# EAGLE board SPEC_ANAL (EAGLE 6.5.0)
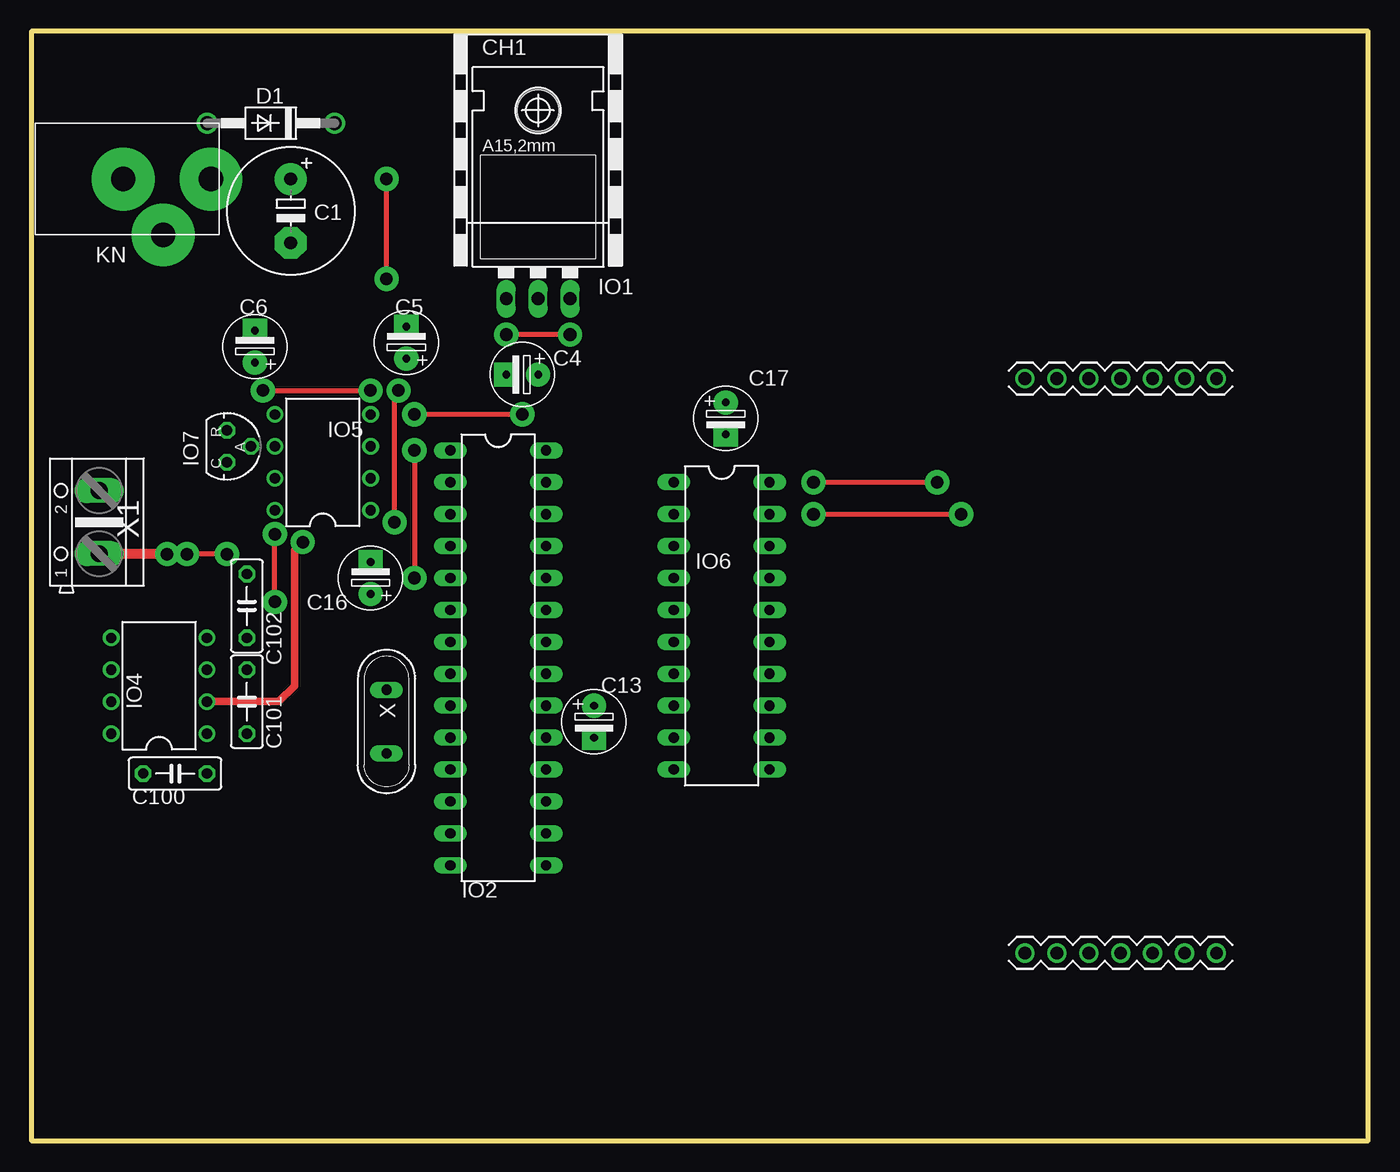
[diagram p0: board, top side]
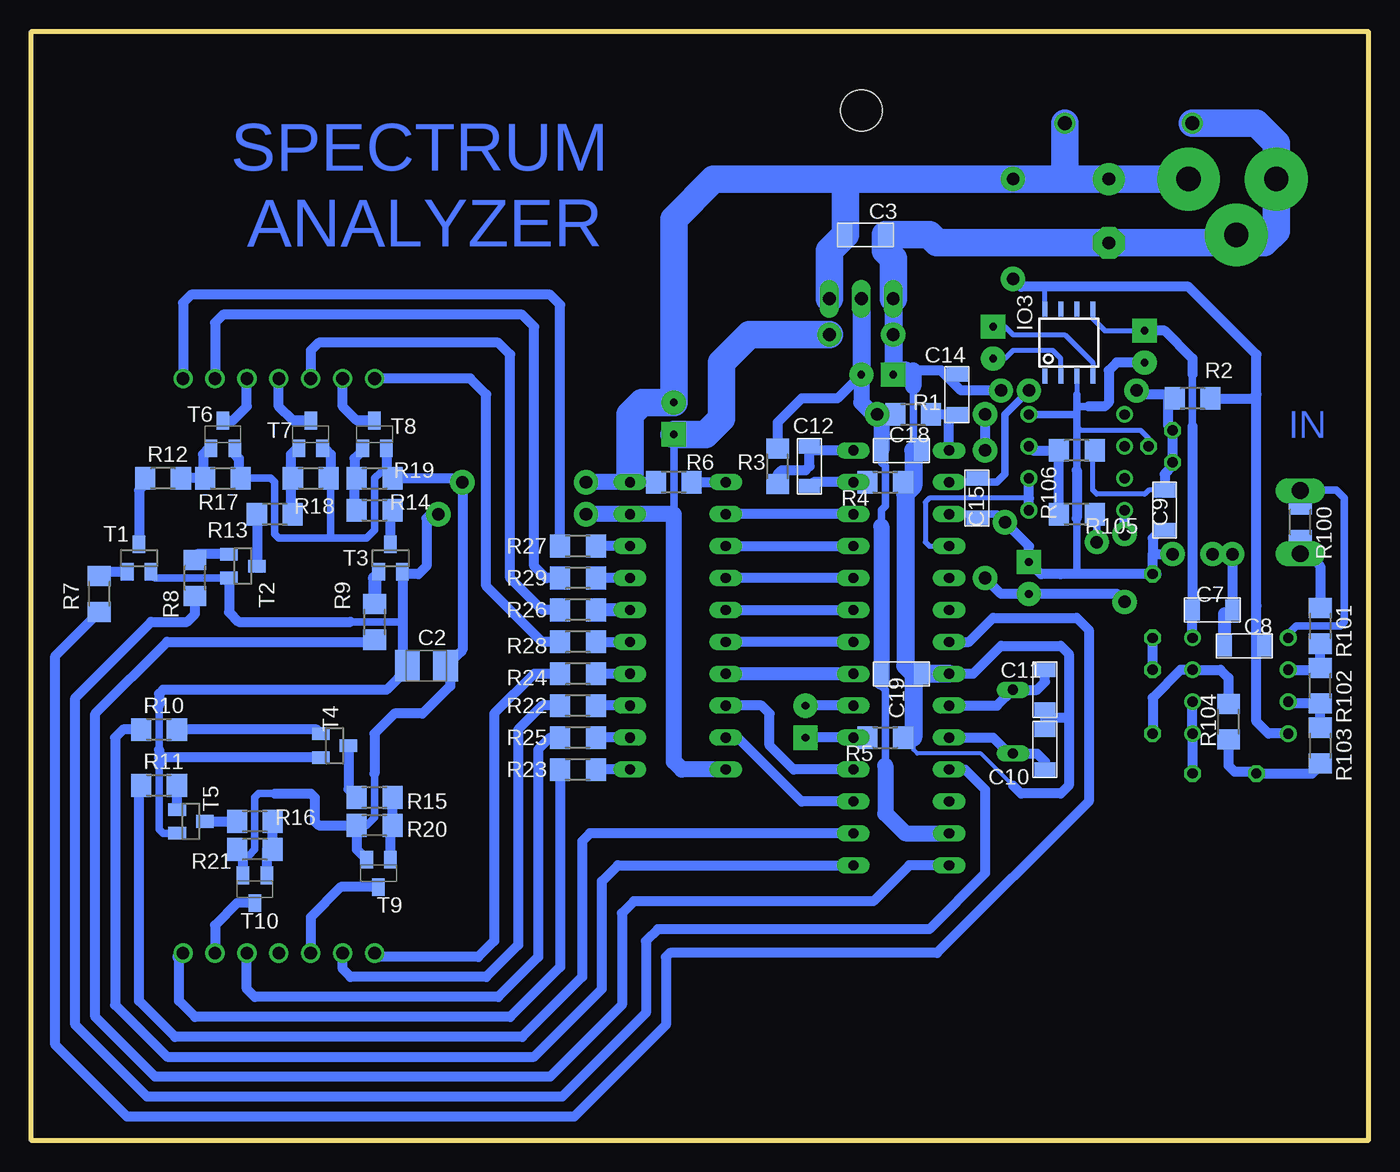
[diagram p1: board, bottom side, seen from below]

Size 106.36 x 88.27 mm. Coordinates in mm from the lower left corner, seen from the top.
Outline: 0,0 106.36,0 106.36,88.27 0,88.27 0,0
Copper layers (1*16): Top 0.035mm / dielectric 1.5mm / Bottom 0.035mm
Design rules "default *": minimum track width 10mil, minimum drill 24mil, track to track 8mil, track to pad 8mil, pad to pad 8mil, via to via 8mil, smd to smd 8mil, copper to edge 40mil, drill to drill 8mil, minimum pad ring 10mil, minimum via ring 8mil, stop-mask expansion 4mil, vias tented up to drill 0mil, thermal gap 10mil

## Footprints (pad centres in the part's own frame; a part is rotated, then mirrored left to right if it is on the bottom)
E5-10,5 = drill 1.016 pad 2.54: + -2.54,0 | drill 1.016 pad 2.54 octagon: - 2.54,0
B/3528-21R = smd 1.95 x 2.5: + 1.525,0; - -1.525,0
CK+ = smd 1.14 x 1.7: 1 -1.587,0; 2 1.587,0
ES-2,5L = drill 0.61 pad 1.93: 1 0,0 | drill 0.61 pad 1.93 square: 2 2.54,0
C050-025X075 = drill 0.813 octagon: 1 -2.54,0; 2 2.54,0
DO41-10 = drill 1.118: A 5.08,0; C -5.08,0
MATRIX_60MM_14PIN = drill 1.016: 1 -7.62,-22.86; 2 -5.08,-22.86; 3 -2.54,-22.86; 4 0,-22.86; 5 2.54,-22.86; 6 5.08,-22.86; 7 7.62,-22.86; 8 7.62,22.86; 9 5.08,22.86; 10 2.54,22.86; 11 0,22.86; 12 -2.54,22.86; 13 -5.08,22.86; 14 -7.62,22.86
TO220L1 = drill 1.016 long: 1 -2.54,-3.81; 2 0,-3.81; 3 2.54,-3.81 | hole 3.302: 0,11.176
DIL28-3 = drill 0.813 long: 1 -16.51,-3.81; 2 -13.97,-3.81; 3 -11.43,-3.81; 4 -8.89,-3.81; 5 -6.35,-3.81; 6 -3.81,-3.81; 7 -1.27,-3.81; 8 1.27,-3.81; 9 3.81,-3.81; 10 6.35,-3.81; 11 8.89,-3.81; 12 11.43,-3.81; 13 13.97,-3.81; 14 16.51,-3.81; 15 16.51,3.81; 16 13.97,3.81; 17 11.43,3.81; 18 8.89,3.81; 19 6.35,3.81; 20 3.81,3.81; 21 1.27,3.81; 22 -1.27,3.81; 23 -3.81,3.81; 24 -6.35,3.81; 25 -8.89,3.81; 26 -11.43,3.81; 27 -13.97,3.81; 28 -16.51,3.81
D_R-PDSO-G08 = smd 0.4 x 1.2: 1 -1.905,-2.65; 2 -0.635,-2.65; 3 0.635,-2.65; 4 1.905,-2.65; 5 1.905,2.65; 6 0.635,2.65; 7 -0.635,2.65; 8 -1.905,2.65
DIL08 = drill 0.813 pad 1.27: 1 -3.81,-3.81; 2 -1.27,-3.81; 3 1.27,-3.81; 4 3.81,-3.81; 5 3.81,3.81; 6 1.27,3.81; 7 -1.27,3.81; 8 -3.81,3.81
DIL20 = drill 0.813 long: 1 -11.43,-3.81; 2 -8.89,-3.81; 3 -6.35,-3.81; 4 -3.81,-3.81; 5 -1.27,-3.81; 6 1.27,-3.81; 7 3.81,-3.81; 8 6.35,-3.81; 9 8.89,-3.81; 10 11.43,-3.81; 11 11.43,3.81; 12 8.89,3.81; 13 6.35,3.81; 14 3.81,3.81; 15 1.27,3.81; 16 -1.27,3.81; 17 -3.81,3.81; 18 -6.35,3.81; 19 -8.89,3.81; 20 -11.43,3.81
TO92-CLP = drill 0.813 octagon: A 0,1.905; C 1.27,0; R -1.27,0
K375A = drill 1.93 pad 5: 1 4.445,6.985; 2 4.445,13.97; 3 8.89,10.16
R1206 = smd 1.6 x 1.803: 1 -1.422,0; 2 1.422,0
SOT23 = smd 1 x 1.4: 1 -0.95,-1.1; 2 0.95,-1.1; 3 0,1.1
SOT23-BEC = smd 1 x 1.4: B -0.95,-1.1; C 0,1.1; E 0.95,-1.1
QS = drill 0.813 long: 1 -2.54,0; 2 2.54,0
AK500/2 = drill 1.321 long: 1 -2.515,0; 2 2.515,0

## Placement (x,y rotation side)
C1  E470M/16V  [E5-10,5]  20.64,73.98 270 top
C2  E10M/16V  [B/3528-21R]  74.93,37.78 0 bottom
C3  CK1206 100N  [CK+]  40.01,72.07 0 bottom
C4  E10M/16V low ERS  [ES-2,5L]  40.32,60.96 180 top
C5  E10M/16V  [ES-2,5L]  29.84,62.23 90 top
C6  E10M/16V  [ES-2,5L]  17.78,61.91 90 top
C7  CK1206 100N  [CK+]  12.38,42.23 0 bottom
C8  CK1206 100N  [CK+]  9.84,39.37 0 bottom
C9  CK1206 1N  [CK+]  16.19,50.16 270 bottom
C10  CK1206 22P  [CK+]  25.72,31.11 270 bottom
C11  CK1206 22P  [CK+]  25.72,35.88 90 bottom
C12  CK1206 100N  [CK+]  44.45,53.66 270 bottom
C13  E10M/16V low ERS  [ES-2,5L]  44.77,34.61 270 top
C14  CK1206 1N  [CK+]  32.7,59.37 90 bottom
C15  CK1206 100N  [CK+]  31.11,51.12 270 bottom
C16  E47M/16V  [ES-2,5L]  26.99,43.5 90 top
C17  E47M/16V  [ES-2,5L]  55.24,58.74 270 top
C18  CK1206 100N  [CK+]  37.15,54.93 0 bottom
C19  CK1206 100N  [CK+]  37.15,37.15 0 bottom
C100  1N  [C050-025X075]  11.43,29.21 0 top
C101  1N  [C050-025X075]  17.14,34.92 90 top
C102  1N  [C050-025X075]  17.14,42.55 90 top
CH1  D0A-L  [D02A-L]  40.32,76.52 270 top
D1  1N4007  [DO41-10]  19.05,80.96 180 top
DISP  [MATRIX_60MM_14PIN]  86.68,37.78 0 top
IO1  LD1117V33  [TO220L1]  40.32,70.8 0 top
IO2  PIC32MX130F064B-I/SP  [DIL28-3]  37.15,38.42 270 top
IO3  TL7660D  [D_R-PDSO-G08]  23.81,63.5 0 bottom
IO4  TL072P  [DIL08]  10.16,36.2 90 top
IO5  MCP6002P  [DIL08]  23.18,53.98 90 top
IO6  74HCT245  [DIL20]  54.93,40.96 270 top
IO7  TL431  [TO92-CLP]  15.56,55.24 270 top
KN  K375A  [K375A]  0.32,80.96 270 top
R1  R1206 10K  [R1206]  36.2,57.78 180 bottom
R2  R1206 330R  [R1206]  13.97,59.05 0 bottom
R3  R1206 10R  [R1206]  46.99,53.66 270 bottom
R4  R1206 0R  [R1206]  38.42,52.39 180 bottom
R5  R1206 0R  [R1206]  38.42,32.07 180 bottom
R6  R1206 0R  [R1206]  55.24,52.39 0 bottom
R7  R1206 1K  [R1206]  100.97,43.5 270 bottom
R8  R1206 1K  [R1206]  93.34,44.77 270 bottom
R9  R1206 1K  [R1206]  79.06,41.27 90 bottom
R10  R1206 1K  [R1206]  96.2,32.7 0 bottom
R11  R1206 1K  [R1206]  96.2,28.26 0 bottom
R12  R1206 1K  [R1206]  95.89,52.7 0 bottom
R13  R1206 1K  [R1206]  87,49.85 0 bottom
R14  R1206 1K  [R1206]  79.06,50.16 180 bottom
R15  R1206 1K  [R1206]  79.06,27.3 0 bottom
R16  R1206 1K  [R1206]  88.58,25.4 0 bottom
R17  R1206 100K  [R1206]  91.12,52.7 180 bottom
R18  R1206 100K  [R1206]  84.14,52.7 180 bottom
R19  R1206 100K  [R1206]  79.06,52.7 180 bottom
R20  R1206 100K  [R1206]  79.06,25.08 0 bottom
R21  R1206 100K  [R1206]  88.58,23.18 0 bottom
R22  R1206 100R  [R1206]  62.87,34.61 0 bottom
R23  R1206 100R  [R1206]  62.87,29.53 0 bottom
R24  R1206 100R  [R1206]  62.87,37.15 0 bottom
R25  R1206 100R  [R1206]  62.87,32.07 0 bottom
R26  R1206 100R  [R1206]  62.87,42.23 0 bottom
R27  R1206 100R  [R1206]  62.87,47.31 0 bottom
R28  R1206 100R  [R1206]  62.87,39.69 0 bottom
R29  R1206 100R  [R1206]  62.87,44.77 0 bottom
R100  R1206 100K  [R1206]  5.4,49.21 270 bottom
R101  R1206 10K  [R1206]  3.81,40.96 90 bottom
R102  R1206 10K  [R1206]  3.81,36.2 270 bottom
R103  R1206 13K3  [R1206]  3.81,31.43 90 bottom
R104  R1206 13K3  [R1206]  11.11,33.34 270 bottom
R105  R1206 10K  [R1206]  23.18,49.85 0 bottom
R106  R1206 10K  [R1206]  23.18,54.93 0 bottom
T1  BC848  [SOT23]  97.79,46.35 0 bottom
T2  BC848  [SOT23]  89.53,45.72 270 bottom
T3  BC848  [SOT23]  77.79,46.35 0 bottom
T4  BC848  [SOT23]  82.23,31.43 270 bottom
T5  BC848  [SOT23]  93.66,25.4 270 bottom
T6  [SOT23-BEC]  91.12,56.2 0 bottom
T7  [SOT23-BEC]  84.14,56.2 0 bottom
T8  [SOT23-BEC]  79.06,56.2 0 bottom
T9  [SOT23-BEC]  78.74,21.27 180 bottom
T10  [SOT23-BEC]  88.58,20 180 bottom
X  QM 8 MHZ  [QS]  28.26,33.34 270 top
X1  [AK500/2]  5.4,49.21 90 top

## Library data of the parts
C1 C2 C100-C102 R1-R29 R100-R106 = rcl
C3-C19 KN X = !MOJE
CH1 = heatsink
D1 = diode
DISP = matrix
IO1 IO7 = v-reg
IO2 = ic-package
IO3 = texas; MPN: TL7660CD; OC_FARNELL: 1755282; OC_NEWARK: 14M2439
IO4 IO5 = linear
IO6 = 74xx-eu
T1-T10 = transistor
X1 = con-ptr500; OC_FARNELL: unknown; OC_NEWARK: unknown

## Nets
+5V: C1.+ C2.+ C3.1 C8.2 C17.1 D1.C IO1.3 IO3.8 IO4.8 IO6.20 KN.2 R2.2 R6.1 R17.1 R18.1 R19.1 R20.1 R21.1 T6.E T7.E T8.E T9.E T10.E
GND: C1.- C2.- C3.2 C4.2 C6.1 C7.2 C8.1 C9.2 C10.1 C11.1 C14.2 C15.2 C16.2 C17.2 C18.2 C19.2 C102.2 D1.A IO1.1 IO2.3 IO2.8 IO3.3 IO5.4 IO6.10 IO6.19 IO7.A KN.1 KN.3 R4.1 R5.1 R100.2 R101.2 T1.2 T2.2 T3.2 T4.2 T5.2 X1.1
N$1: C14.1 IO2.1 R1.1
N$2: IO2.7 R7.2
N$3: IO2.26 IO6.2
N$4: IO2.25 IO6.3
N$5: R10.2 T4.1
N$6: IO2.24 IO6.4
N$7: C11.2 IO2.9 X.1
N$8: C10.2 IO2.10 X.2
N$9: IO2.23 IO6.5
N$10: IO2.22 IO6.6
N$11: C12.2 IO2.27 R4.2
N$12: C13.2 IO2.19 R5.2
N$13: IO2.21 IO6.7
N$14: IO2.18 IO6.8
N$15: IO2.17 IO6.9
N$16: R15.1 T4.3
N$17: IO2.15 R10.1
N$18: R9.2 T3.1
N$19: R15.2 R20.2 T9.B
N$20: DISP.10 T6.C
N$21: DISP.11 T7.C
N$22: DISP.13 T8.C
N$23: IO6.11 R23.2
N$24: IO6.15 R28.2
N$25: IO6.16 R26.2
N$26: IO6.17 R29.2
N$27: IO6.18 R27.2
N$28: IO6.13 R22.2
N$29: IO6.14 R24.2
N$30: IO6.12 R25.2
N$31: C13.1 IO2.20
N$32: C12.1 IO2.28 R3.2
N$33: DISP.14 R28.1
N$34: DISP.8 R27.1
N$35: DISP.12 R26.1
N$36: DISP.5 R25.1
N$37: DISP.1 R24.1
N$38: DISP.7 R23.1
N$39: DISP.2 R22.1
N$40: DISP.9 R29.1
N$41: IO2.11 R8.2
N$42: IO2.16 R11.1
N$43: R11.2 T5.1
N$44: R16.1 T5.3
N$45: R16.2 R21.2 T10.B
N$46: DISP.6 T10.C
N$47: DISP.3 T9.C
N$48: R14.1 T3.3
N$49: R14.2 R19.2 T8.B
N$50: R7.1 T1.1
N$51: IO2.14 R9.1
N$52: R8.1 T2.1
N$53: R13.1 T2.3
N$54: R13.2 R18.2 T7.B
N$55: IO2.4 IO5.1 IO5.2
N$56: R12.1 T1.3
N$57: R12.2 R17.2 T6.B
N$58: IO5.3 R105.1 R106.1
N$59: IO4.6 R101.1 R102.1
N$60: IO4.5 R100.1 X1.2
N$61: C9.1 C15.1 IO2.2 IO7.C IO7.R R2.1 R106.2
N$62: C6.2 C7.1 IO3.5 IO4.4
N$63: C5.1 IO3.2
N$64: C5.2 IO3.4
N$65: IO6.1 R6.2
N$67: C100.1 R103.1 R104.2
N$68: C101.1 IO4.3 R104.1
N$69: C100.2 IO4.1 IO4.2 R105.2
N$70: C101.2 C102.1
N$72: IO4.7 R102.2 R103.2
VDD: C4.1 C16.1 C18.1 C19.1 IO1.2 IO2.13 IO5.8 R1.2 R3.1

## Tracks (layer width: path | path; a pad name or v marks a point on that pad's centre or on a via)
+5V  (via drill 1 pad 1.93)
  Top 0.406: v28.26,68.58 v28.26,76.52 | v62.23,52.39 v72.07,52.39
  Bottom 0.254: C2.+ 73.39,37.78 73.05,38.12 | C8.2 8.89,39.37 8.89,42.55
  Bottom 0.406: IO3.8 25.72,67.94
  Bottom 0.61: 89.53,22.71 89.06,22.71 88.58,23.18 88.58,27.3 88.27,27.62 87,27.62 | 79.06,29.21 79.06,25.72 79.69,25.08 R20.1 | 78.11,53.18 78.58,53.18 79.06,52.7 79.06,48.58 79.69,47.94 82.55,47.94 | 82.55,47.94 82.55,52.54 R18.1 | 89.85,54.29 89.85,53.02 89.53,52.7 87.31,52.7 87,52.39 87,48.26 86.68,47.94 82.55,47.94
  Bottom 0.813: T9.E 80.48,23.16 R20.1 83.5,25.08 83.82,25.4 83.82,27.3 84.14,27.62 87,27.62 | T10.E 89.53,22.71 R21.1 | T8.E 78.11,53.18 R19.1 72.39,52.7 v72.07,52.39 72.07,39.05 73.05,38.12 73.05,36.17 75.25,33.97 77.47,33.97 79.06,32.38 79.06,29.21 | T7.E 83.04,55.1 82.55,54.61 82.55,52.87 R18.1 | T6.E 90.17,54.61 89.85,54.29 89.85,52.86 R17.1 | v28.26,68.58 27.62,67.94 25.72,67.94 14.29,67.94 8.89,62.55 8.89,59.37 | 58.74,53.02 IO6.20 R6.1 | IO4.8 7.94,32.38 8.89,33.34 8.89,42.55 8.89,59.37 | R2.2 9.21,59.05 8.89,59.37
  Bottom 1.27: IO6.20 v62.23,52.39
  Bottom 2.184: KN.2 C1.+ 23.81,76.52 | 23.81,76.52 v28.26,76.52 41.59,76.52 | 41.59,76.52 C3.1 42.86,70.8 IO1.3 | D1.C 24.13,76.83 23.81,76.52 | 41.59,76.52 52.07,76.52 55.24,73.34 C17.1 57.78,58.74 58.74,57.78 58.74,53.02
GND  (via drill 1 pad 1.93)
  Top 0.406: v42.86,64.14 v37.78,64.14 | v62.23,49.85 v73.98,49.85 | v15.56,46.67 v12.38,46.67 | v28.89,49.21 28.89,59.37 v29.21,59.69
  Top 0.813: X1.1 10.77,46.7 v10.79,46.67
  Bottom 0.254: C2.- 76.45,37.53 77.15,36.83 | 17.46,45.09 C102.2 | C14.2 33.66,60.96 | C15.2 31.11,49.85 | R100.2 X1.1
  Bottom 0.305: 28.26,28.26 30.8,30.8 35.88,30.8 36.2,31.11 36.2,32.07 | 36.2,54.93 36.2,53.98 35.88,53.98 35.88,54.61 C18.2
  Bottom 0.406: IO3.3 23.18,59.37 | IO7.A 17.46,55.88 18.1,56.52 22.86,56.52 23.18,56.83
  Bottom 0.61: R4.1 36.51,52.39 36.2,52.07 | 96.2,29.84 96.2,24.77 95.89,24.45 T5.2 | 96.2,34.61 96.2,31.11 | 80.96,41.27 76.84,41.27 | T1.2 96.84,45.09 96.52,44.77 T2.2 | 36.2,60.01 36.2,55.56 C18.2 | IO5.4 23.18,57.78 | 23.18,57.78 23.18,56.83 23.18,53.34 | 23.18,49.53 23.18,45.09 24.45,45.09 | 23.18,59.37 23.18,58.42 | 23.18,58.42 23.18,57.78 | 55.24,49.85 C17.2 | IO2.3 31.11,49.85 29.53,49.85 v28.89,49.21 | 22.23,58.42 23.18,58.42
  Bottom 0.813: 23.81,33.66 23.81,38.73 24.45,39.37 29.21,39.37 31.43,37.15 IO2.8 | 23.81,33.66 23.81,28.26 24.45,27.62 27.62,27.62 28.26,28.26 | 25.72,33.66 C10.1 | C11.1 25.72,33.66 | 25.72,33.66 23.81,33.66 | R5.1 36.51,32.07 36.2,32.38 | T4.2 96.2,30.48 | 96.2,30.48 96.2,29.84 | 96.2,34.61 96.2,35.56 95.89,35.88 78.11,35.88 77.15,36.83 76.84,37.15 76.84,41.27 T3.2 76.67,45.09 75.56,45.09 74.93,45.72 74.93,49.53 74.61,49.85 v73.98,49.85 | 96.2,31.11 96.2,30.48 | T2.2 90.64,42.06 89.85,41.27 80.96,41.27 | 23.18,53.34 23.18,49.53 | 17.46,45.09 24.45,45.09 26.04,45.09 C16.2 26.99,47.31 v28.89,49.21 | X1.1 4.79,46.7 3.81,45.72 R101.2 | 16.83,45.09 C102.2 17.14,46.67 | 17.14,46.67 v15.56,46.67 | v12.38,46.67 v10.79,46.67 C7.2 | v29.21,59.69 32.38,59.69 33.66,60.96 33.97,61.28 37.47,61.28 | C9.2 16.51,48.58 17.14,47.94 17.14,46.67 | C6.1 20,61.91 20.64,61.28 20.64,58.74 20.95,58.42 22.23,58.42
  Bottom 1.016: C7.2 10.79,41.91 11.43,41.91 C8.1
  Bottom 1.27: 36.83,61.28 36.2,61.28 36.2,60.01 | IO6.10 54.61,29.53 55.24,30.16 55.24,49.85 IO6.19 v62.23,49.85
  Bottom 1.422: IO1.1 v37.78,64.14 C4.2 37.47,61.28 36.83,61.28 | 36.2,54.93 36.2,52.07 36.83,51.44 | 36.83,51.75 36.83,51.44 | 36.83,51.44 36.83,37.78 36.2,37.15 | 36.2,37.15 36.2,32.38 36.2,32.07 | IO2.8 C19.2 36.2,37.15
  Bottom 2.184: 10.48,71.44 8.26,71.44 7.3,72.39 KN.1 7.3,79.38 8.89,80.96 D1.A | KN.3 10.48,71.44 | 10.48,71.44 C1.- 34.29,71.44 34.92,72.07 C3.2 38.42,70.8 37.78,70.17 IO1.1 | v42.86,64.14 49.21,64.14 51.44,61.91 51.44,57.47 52.7,56.2 C17.2
N$1
  Bottom 0.254: C14.1 33.34,57.78 33.5,57.63
  Bottom 0.813: IO2.1 33.34,57.47 33.5,57.63 33.66,57.78 R1.1
N$2
  Bottom 0.813: IO2.7 31.75,39.69 29.84,41.59 23.18,41.59 22.23,40.64 22.23,26.99 34.29,14.92 55.56,14.92 55.88,14.61 55.88,9.21 63.18,1.91 98.74,1.91 104.46,7.62 104.46,38.58 R7.2
N$3
  Bottom 0.813: IO2.26 IO6.2
N$4
  Bottom 0.813: IO6.3 IO2.25
N$5
  Bottom 0.813: T4.1 83.67,32.7 R10.2
N$6
  Bottom 0.813: IO2.24 IO6.4
N$7
  Bottom 0.813: IO2.9 29.53,34.61 X.1 26.35,35.88 25.72,36.51 C11.2
N$8
  Bottom 0.813: IO2.10 29.84,32.07 28.57,30.8 X.2 26.35,30.8 25.72,30.16 C10.2
N$9
  Bottom 0.813: IO6.5 IO2.23
N$10
  Bottom 0.813: IO2.22 IO6.6
N$11
  Bottom 0.813: R4.2 IO2.27 44.13,52.39 C12.2
N$12
  Bottom 0.813: R5.2 IO2.19 C13.2
N$13
  Bottom 1.016: IO2.21 IO6.7
N$14
  Bottom 0.813: IO2.18 45.72,29.53 47.62,31.43 47.62,33.97 48.26,34.61 IO6.8
N$15
  Bottom 0.813: IO2.17 45.09,26.99 50.16,32.07 IO6.9
N$16
  Bottom 0.813: T4.3 81.13,27.96 R15.1
N$17
  Bottom 0.813: R10.1 99.06,32.7 99.69,32.07 99.69,10.79 95.57,6.67 66.36,6.67 60.96,12.06 60.96,20.64 59.69,21.91 IO2.15
N$18
  Bottom 1.016: T3.1 78.74,45.09 79.06,44.77 R9.2
N$19
  Bottom 0.813: T9.B 77.79,24.93 R20.2 R15.2
N$20
  Bottom 0.813: T6.C 90.34,57.3 89.22,58.42 DISP.10
N$21
  Bottom 0.813: T7.C 85.56,57.3 86.68,58.42 DISP.11
N$22
  Bottom 0.813: T8.C 80.47,57.3 81.6,58.42 DISP.13
N$23
  Bottom 0.813: IO6.11 R23.2
N$24
  Bottom 0.813: R28.2 IO6.15
N$25
  Bottom 1.016: IO6.16 R26.2
N$26
  Bottom 0.813: IO6.17 R29.2
N$27
  Bottom 0.813: IO6.18 R27.2
N$28
  Bottom 0.813: IO6.13 R22.2
N$29
  Bottom 0.813: IO6.14 R24.2
N$30
  Bottom 0.813: IO6.12 R25.2
N$31
  Bottom 0.813: IO2.20 C13.1
N$32
  Bottom 0.813: IO2.28 44.13,54.93 C12.1 44.45,53.66 44.77,53.34 46.67,53.34 46.99,53.02 R3.2
N$33
  Bottom 0.813: R28.1 65.72,39.69 70.17,44.13 70.17,59.37 71.44,60.64 DISP.14
N$34
  Bottom 0.813: R27.1 64.29,66.51 65.09,67.31 93.66,67.31 94.3,66.67 DISP.8
N$35
  Bottom 0.813: R26.1 65.72,42.23 68.26,44.77 68.26,62.55 69.22,63.5 83.5,63.5 84.14,62.87 DISP.12
N$36
  Bottom 0.813: R25.1 65.09,32.07 66.04,31.11 66.04,14.61 69.22,11.43 88.58,11.43 89.22,12.06 DISP.5
N$37
  Bottom 0.813: R24.1 66.36,37.15 69.53,33.97 69.53,15.88 70.8,14.61 78.74,14.61 DISP.1
N$38
  Bottom 0.813: R23.1 64.29,13.82 68.26,9.84 93.34,9.84 94.61,11.11 94.61,14.61
  Bottom 1.016: 94.61,14.61 DISP.7
N$39
  Bottom 0.813: R22.1 65.72,34.61 67.63,32.7 67.63,15.56 70.17,13.02 80.96,13.02 81.6,13.65 DISP.2
N$40
  Bottom 0.813: R29.1 65.41,44.77 66.36,45.72 66.36,64.77 67.31,65.72 91.12,65.72 91.76,65.09 DISP.9
N$41
  Bottom 0.813: IO2.11 32.07,29.53 30.48,27.94 30.48,21.27 34.92,16.83 56.52,16.83 57.47,15.88 57.47,10.16 64.14,3.49 97.16,3.49 102.87,9.21 102.87,35.24 96.84,41.27 93.98,41.27 93.34,41.91 R8.2
N$42
  Bottom 0.813: IO2.16 61.91,24.45 62.55,23.81 62.55,13.02 67.31,8.26 94.93,8.26 97.79,11.11 97.79,28.09 R11.1
N$43
  Bottom 0.813: T5.1 94.76,27.61 R11.2
N$44
  Bottom 0.813: T5.3 R16.1
N$45
  Bottom 0.813: R16.2 R21.2 87.63,23.18 87.63,22.38 T10.B
N$46
  Bottom 0.813: DISP.6 91.76,17.14 90,18.9 T10.C
N$47
  Bottom 0.813: DISP.3 84.14,17.78 81.75,20.17 T9.C
N$48
  Bottom 0.813: T3.3 77.79,50.01 R14.1
N$49
  Bottom 0.813: T8.B 80.01,54.93 80.64,54.29 80.64,52.87 R19.2 80.64,52.54 80.64,50.48 80.48,50.32 R14.2
N$50
  Bottom 0.813: T1.1 100.63,45.26 R7.1
N$51
  Bottom 0.813: IO2.14 36.51,21.91 39.37,19.05 58.42,19.05 59.37,18.1 59.37,10.79 65.09,5.08 96.52,5.08 101.28,9.84 101.28,33.97 95.57,39.69 79.22,39.69 R9.1
N$52
  Bottom 0.813: T2.1 93.18,46.67 R8.1
N$53
  Bottom 0.813: R13.1 88.42,45.74 T2.3
N$54
  Bottom 0.254: R18.2 85.56,54.13 85.72,54.29
  Bottom 0.813: T7.B 85.24,55.1 85.72,54.61 85.72,54.29 85.72,50.33 R13.2
N$55
  Bottom 0.406: 26.99,51.12 34.92,51.12 35.24,50.8 35.24,47.62 34.92,47.31 IO2.4
  Bottom 0.813: IO5.1 26.99,51.12 IO5.2
N$56
  Bottom 0.813: R12.1 97.31,52.24 97.79,51.75 T1.3
N$57
  Bottom 0.813: T6.B 92.22,55.1 92.71,54.61 92.71,52.87 R17.2 R12.2
N$58
  Bottom 0.813: IO5.3 26.67,54.93 R106.1 R105.1
N$59
  Bottom 0.813: IO4.6 3.96,37.47 R102.1 R101.1
N$60
  Bottom 0.254: R100.1 X1.2
  Bottom 0.61: IO4.5 6.35,40.32 5.71,40.96 2.22,40.96 1.91,41.27 1.91,51.12 2.54,51.75 5.37,51.75 X1.2
N$61  (via drill 1 pad 1.93)
  Top 0.406: v18.41,59.69 v26.99,59.69
  Bottom 0.254: C15.1 31.11,52.39 | R2.1 15.56,59.05 15.88,58.74
  Bottom 0.406: 21.76,54.78 R106.2 21.91,54.78 21.91,51.75 21.59,51.44 17.78,51.44 17.46,51.75 C9.1
  Bottom 0.61: v26.99,59.69 28.89,57.78 28.89,53.02 29.53,52.39 31.11,52.39 IO2.2
  Bottom 0.813: v18.41,59.69 18.1,59.37 15.88,59.37 15.88,58.74 15.88,56.83 IO7.R IO7.C 15.56,53.66 16.19,53.02 C9.1
N$62
  Bottom 0.406: IO3.5 21.91,65.41 20.95,64.45 C6.2
  Bottom 0.61: 13.97,60.96 13.97,56.83
  Bottom 0.813: C6.2 16.19,64.45 13.97,62.23 13.97,60.96 | IO4.4 C7.1 | 13.97,42.55 C7.1 | 13.97,56.83 C7.1
N$63
  Bottom 0.406: IO3.2 24.45,62.23 25.08,62.87 28.26,62.87 28.89,62.23 C5.1
N$64
  Bottom 0.406: C5.2 28.89,64.77 28.26,64.14 24.13,64.14 21.91,61.91 IO3.4
N$65
  Bottom 0.813: R6.2 IO6.1
N$67
  Bottom 0.813: R104.2 11.11,29.84 10.64,29.38 9.06,29.38 C100.1 4.45,29.21 3.81,29.84 R103.1
N$68
  Bottom 0.813: R104.1 11.11,36.83 11.75,37.47 IO4.3 14.92,37.47 17.14,35.24 C101.1
N$69  (via drill 1 pad 1.93)
  Top 0.61: IO4.2 19.68,34.92 20.95,36.2 20.95,46.99 v21.59,47.62
  Bottom 0.61: v21.59,47.62 21.59,49.68 R105.2
  Bottom 0.813: IO4.2 IO4.1 C100.2
N$70
  Bottom 0.813: C101.2 C102.1
N$72
  Bottom 0.813: IO4.7 6.2,34.77 R102.2 R103.2
VDD  (via drill 1 pad 1.93)
  Top 0.406: v39.05,57.78 v30.48,57.78 | v30.48,54.93 v30.48,44.77 | v19.37,42.86 v19.37,48.26
  Bottom 0.254: R1.2 v39.05,57.78 | C19.1 38.73,36.2
  Bottom 0.61: C18.1 38.73,53.98 38.42,53.66 38.42,50.48 38.73,50.16 38.73,48.9 | 38.73,36.51 38.73,36.2 38.42,35.88 38.42,29.84
  Bottom 0.813: C4.1 42.23,59.05 45.09,59.05 46.99,57.15 R3.1 | v30.48,57.78 v30.48,54.93 | v19.37,42.86 20,43.5 C16.1 29.21,43.5 v30.48,44.77 | v19.37,48.26 IO5.8
  Bottom 1.27: C4.1 40.32,58.74 39.37,57.78 v39.05,57.78 38.73,57.78 | R1.2 38.73,57.78 | 38.73,57.78 C18.1 | 38.73,48.9 C19.1 38.73,36.51 | 38.42,29.84 38.42,26.04 36.83,24.45 IO2.13
  Bottom 1.422: IO1.2 C4.1

## Text on the board
Bottom: SPECTRUM | ANALYZER | IN